# Altium PCB SparkFun GPS NEO_M9N_SMA.PcbDoc
Units mil, origin at the board's own origin, x right, y up, seen from the top; angles counter-clockwise.
Board outline 1600 x 1449 mil, 2 copper layers (Top, Bottom); 94 components, 36 nets, 153 pads, 246 vias.
Unrouted connection lines stored in the file: 1.
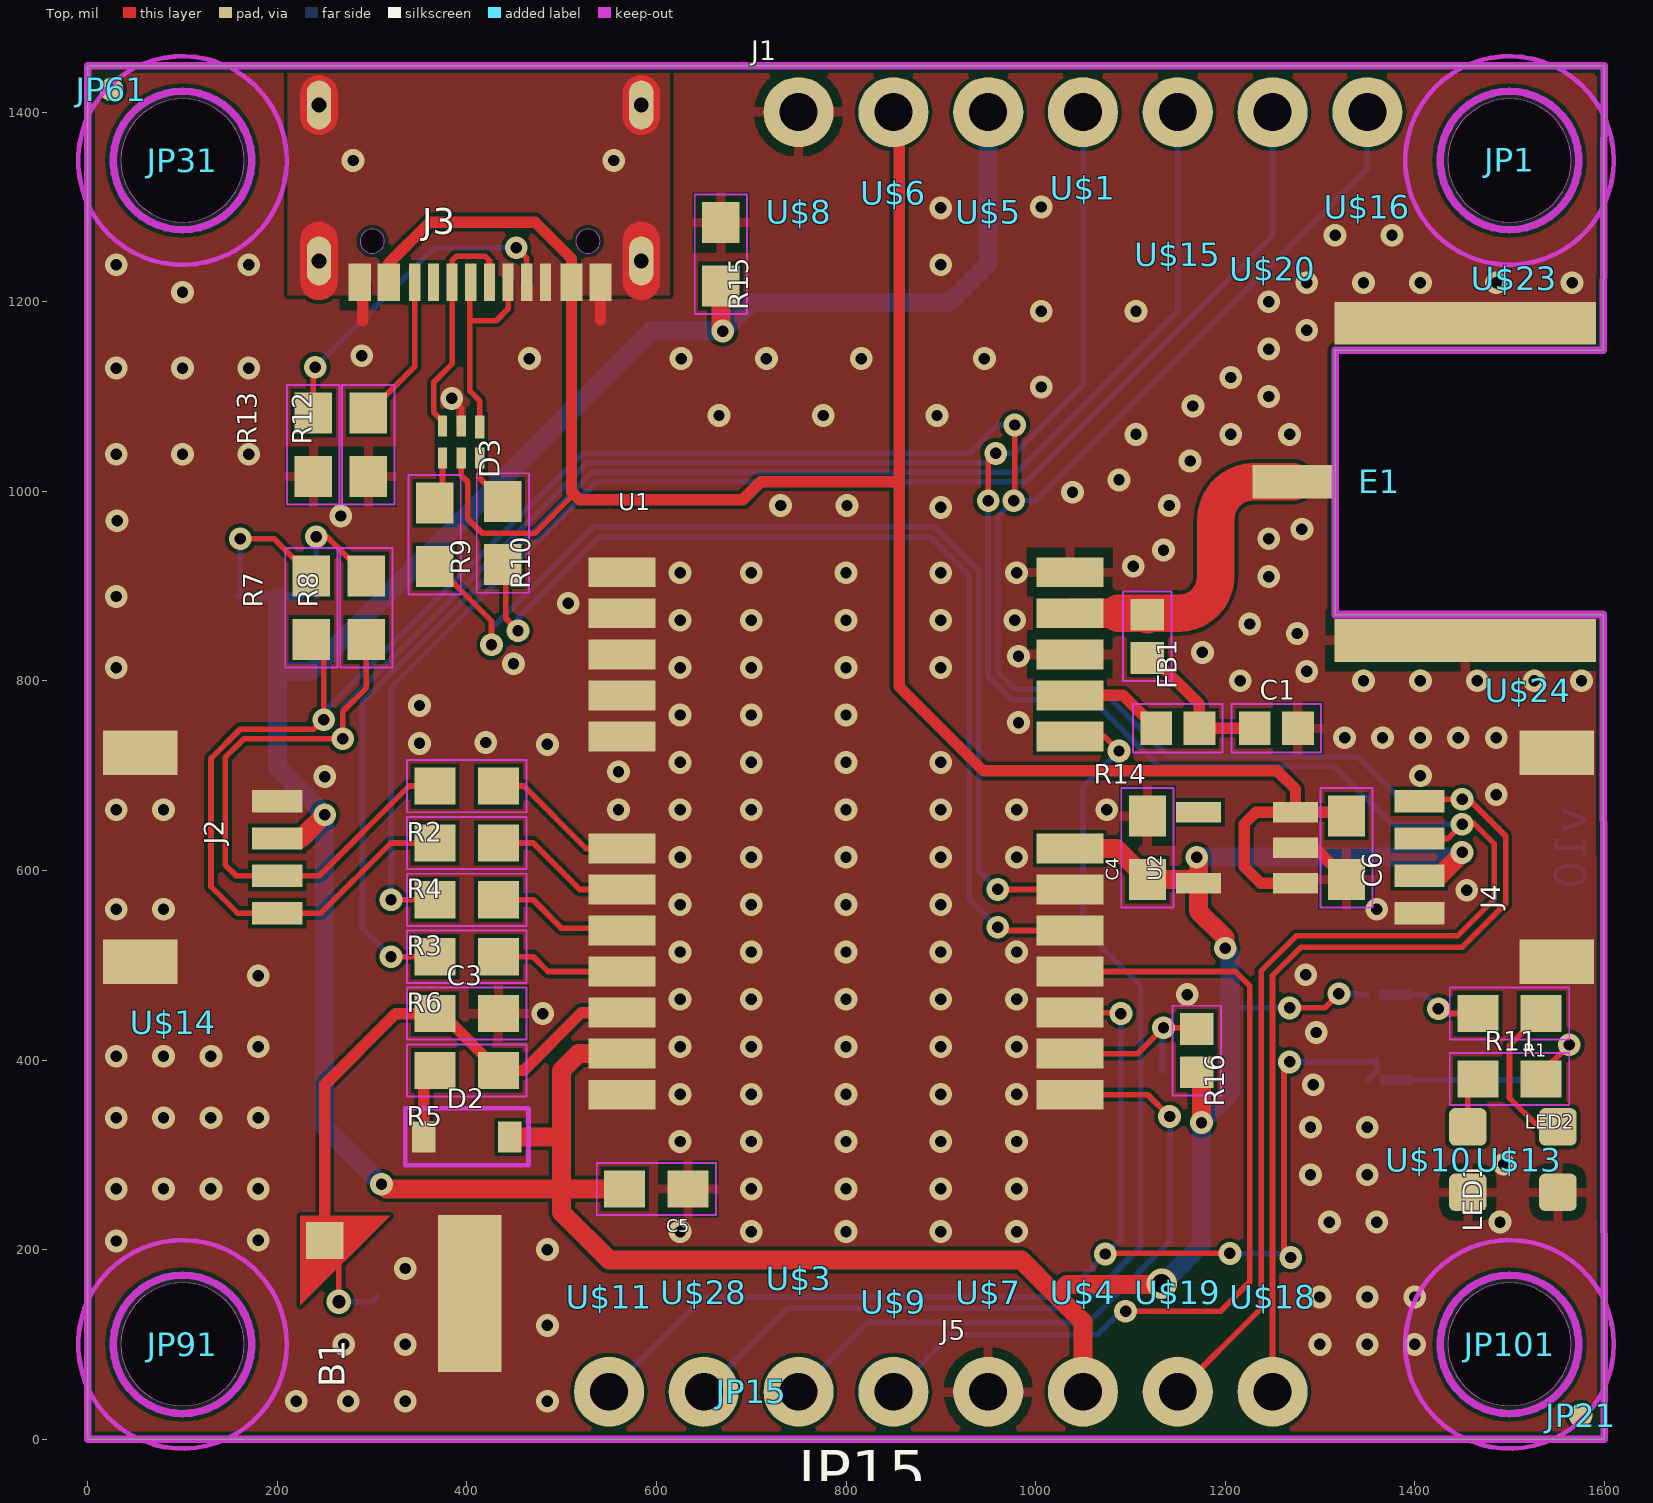
[diagram p0: Top view]
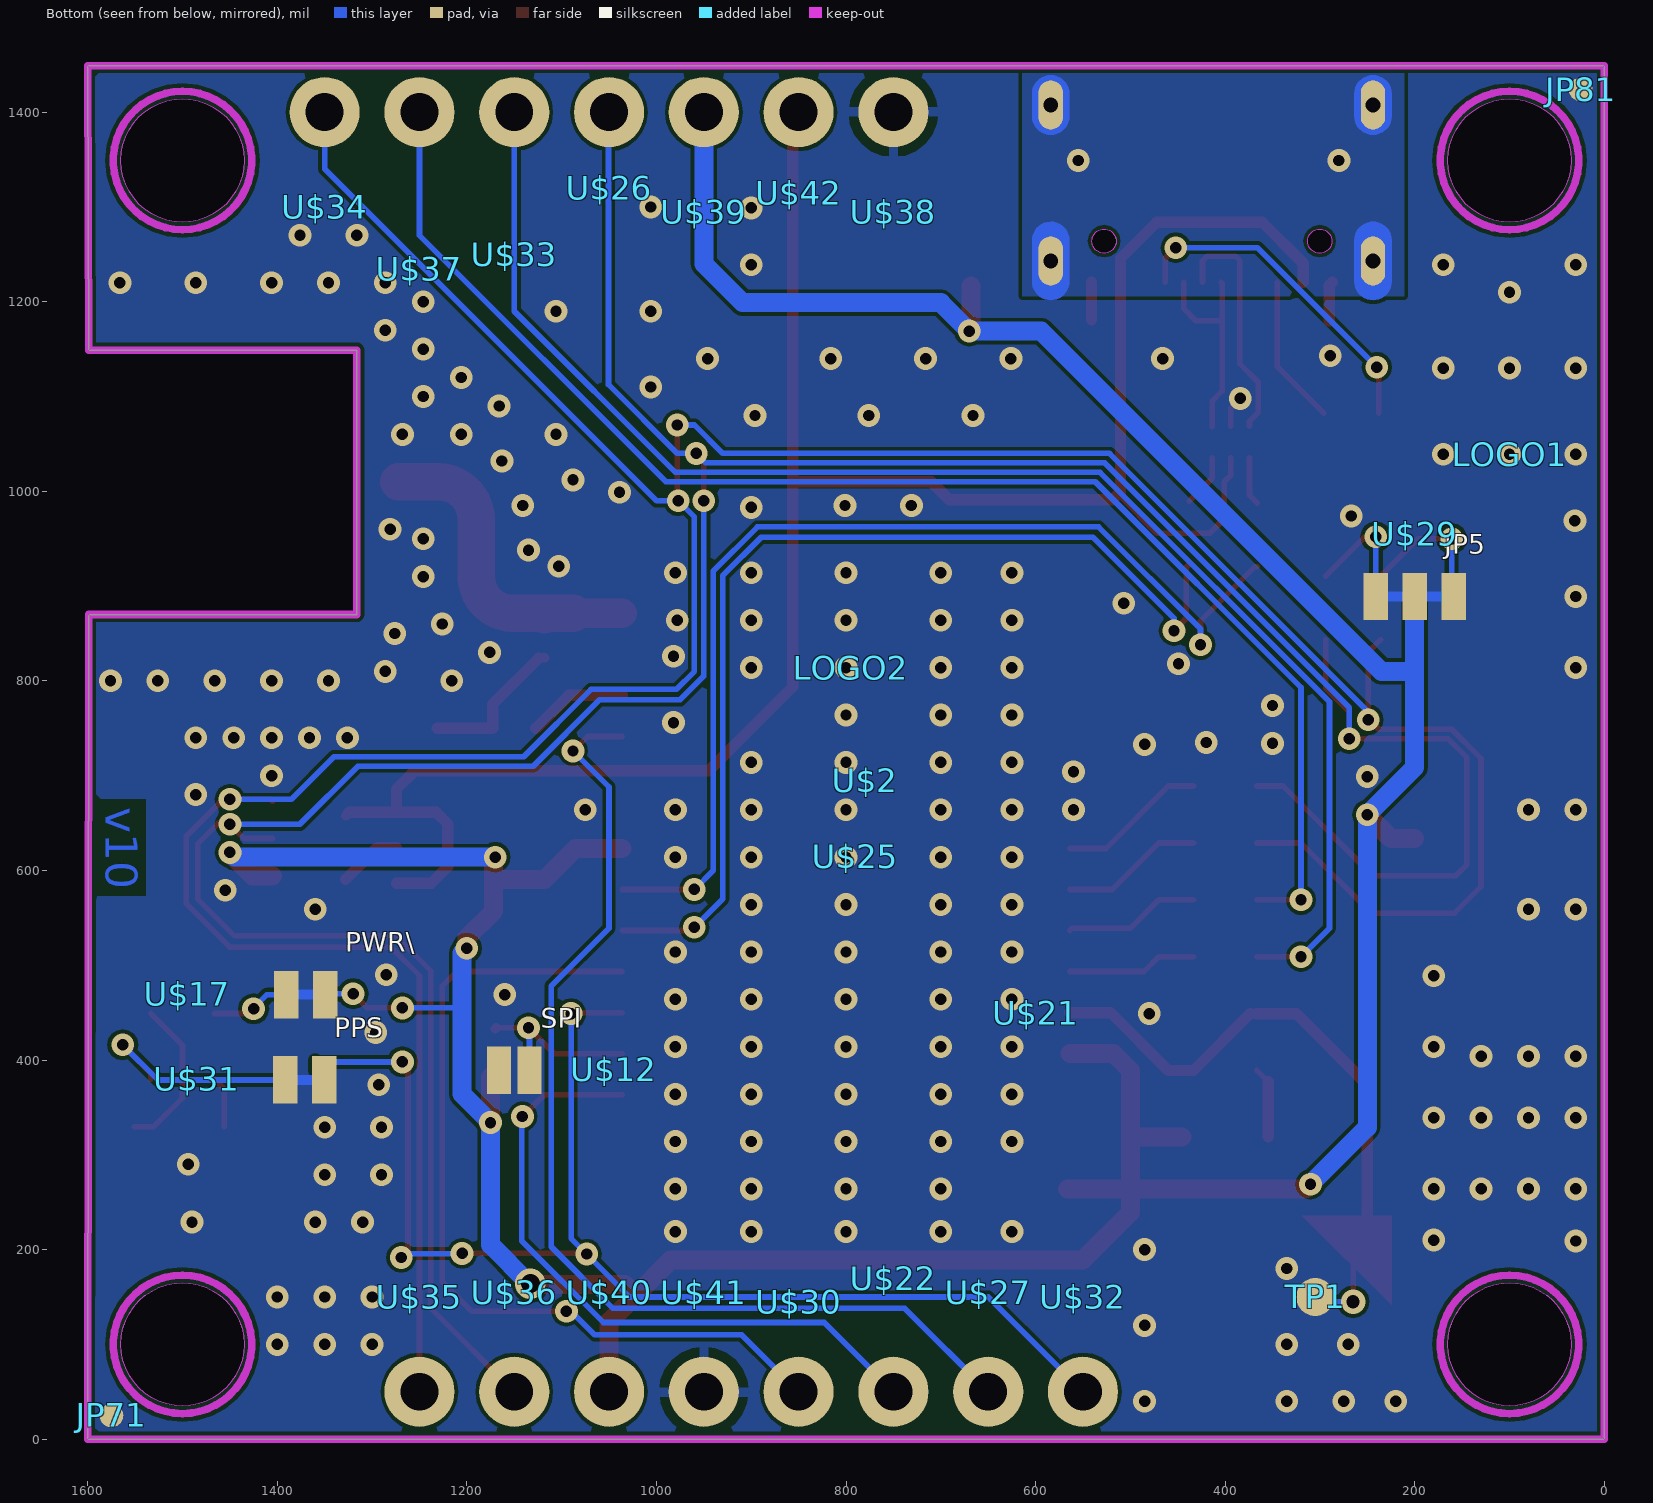
[diagram p1: Bottom view, seen from below]

## Layer stack, top to bottom
Top Solder: solder mask 0.4, Solder Resist, Dk 3.5
Top: signal copper 1.378
Dielectric 1: dielectric 12.6, FR-4, Dk 4.8
Bottom: signal copper 1.378
Bottom Solder: solder mask 0.4, Solder Resist, Dk 3.5

## Board outline
1599,1149 1600,1449 0,1449 0,0 1600,0 1599,870 1316,870 1316,1149
cut-out: 1500,35 ccw(c1500,100) 1565,100 ccw(c1500,100) 1500,165 ccw(c1500,100) 1435,100 ccw(c1500,100)
cut-out: 1500,1284 ccw(c1500,1349) 1565,1349 ccw(c1500,1349) 1500,1414 ccw(c1500,1349) 1435,1349 ccw(c1500,1349)
cut-out: 100,1284 ccw(c100,1349) 165,1349 ccw(c100,1349) 100,1414 ccw(c100,1349) 35,1349 ccw(c100,1349)
cut-out: 100,35 ccw(c100,100) 165,100 ccw(c100,100) 100,165 ccw(c100,100) 35,100 ccw(c100,100)
cut-out: 300.22,1251.1 ccw(c300.22,1263.89) 313.01,1263.89 ccw(c300.22,1263.89) 300.22,1276.68 ccw(c300.22,1263.89) 287.43,1263.89 ccw(c300.22,1263.89)
cut-out: 527.78,1251.1 ccw(c527.78,1263.89) 540.58,1263.89 ccw(c527.78,1263.89) 527.78,1276.68 ccw(c527.78,1263.89) 514.99,1263.89 ccw(c527.78,1263.89)

## Design rules (kind name [scope] priority, off if disabled: settings)
BoardOutlineClearance mdCopperDimension [All] p1: gap=10 ignorepadtopadclearanceinfootprint=FALSE except(0: Arc-SplitContinuation Track-SplitContinuation SMDPad-SplitContinuation THPad-SplitContinuation Via-SplitContinuation Fill-SplitContinuation Poly-SplitContinuation Region-SplitContinuation Text-SplitContinuation; 4: Poly-OutlineEdge Poly-CavityEdge Poly-CutoutEdge Poly-SplitBarrior)
Clearance "Clearance (Same Net)" [All] p1: gap=4 ignorepadtopadclearanceinfootprint=FALSE
Clearance Clearance_for_NetClass_Antenna [InNetClass('Antenna') vs InNetClass('Antenna')] p2: gap=11.81 ignorepadtopadclearanceinfootprint=FALSE
Clearance [All] p3: gap=4 ignorepadtopadclearanceinfootprint=FALSE
HoleSize HoleSize_For_NetClass_Antenna [InNetClass('Antenna')] p1: absolutevalues=TRUE maxlimit=0 minlimit=0 maxpercent=80.000 minpercent=20.000
HoleSize HoleSize_For_NetClass_3.3V [InNetClass('3.3V')] p2: absolutevalues=TRUE maxlimit=0 minlimit=0 maxpercent=80.000 minpercent=20.000
HoleSize HoleSize_For_NetClass_vcc [InNetClass('vcc')] p3: absolutevalues=TRUE maxlimit=0 minlimit=0 maxpercent=80.000 minpercent=20.000
HoleSize [All] p4: absolutevalues=TRUE maxlimit=100000 minlimit=6 maxpercent=80.000 minpercent=20.000
HoleToHoleClearance mdDrill [All] p1: gap=4 allowstackedmicrovias=TRUE
MinimumSolderMaskSliver [All] p1 off: minsoldermaskwidth=10
PasteMaskExpansion Expansion_SMDPaste_OFF [InPadClass('SMDPaste_OFF')] p1: expansion=0
PasteMaskExpansion mlMinCreamFrame [All] p2: expansion=0
PolygonConnect PolygonConnect_For_PolygonThermal_ON_Width100000_Gap100000 [InPolygonClass('PolygonThermal_ON_Width100000_Gap100000') vs Not IsVia] p1: connectstyle=Relief reliefconductorwidth=10 reliefentries=4 polygonreliefangle="90 Angle" airgapwidth=10
PolygonConnect PolygonConnect_For_PolygonThermal_ON_Width80000_Gap100000 [InPolygonClass('PolygonThermal_ON_Width80000_Gap100000') vs Not IsVia] p2: connectstyle=Relief reliefconductorwidth=8 reliefentries=4 polygonreliefangle="90 Angle" airgapwidth=10
PolygonConnect ThermalVias [IsVia] p3: connectstyle=Direct reliefconductorwidth=10 reliefentries=4 polygonreliefangle="90 Angle" airgapwidth=10
PolygonConnect [All] p4: connectstyle=Relief reliefconductorwidth=10 reliefentries=4 polygonreliefangle="90 Angle" airgapwidth=10
RoutingVias [All] p1: holewidth=6 width=16 viastyle="Through Hole" minholewidth=6 minwidth=16 maxholewidth=100 maxwidth=100
SolderMaskExpansion Expansion_SMDSolder_OFF [InPadClass('SMDSolder_OFF')] p1: expansion=0 istentingtop=FALSE
SolderMaskExpansion mlMinStopFrame [All] p2: expansion=4 istentingtop=FALSE
Width Width_For_NetClass_Antenna [InNetClass('Antenna')] p1: maxlimit=78.74 minlimit=10 preferedwidth=39.37
Width Width_For_NetClass_3.3V [InNetClass('3.3V')] p2: maxlimit=40 minlimit=10 preferedwidth=20
Width Width_For_NetClass_vcc [InNetClass('vcc')] p3: maxlimit=10 minlimit=6 preferedwidth=6
Width [All] p4: maxlimit=10000 minlimit=4 preferedwidth=4
26 further rules are at their usual default settings.

## Classes and differential pairs
polygon class PolygonThermal_ON_Width100000_Gap100000: Polygon_1_Net_GND Polygon_2_Net_GND
polygon class PolygonThermal_ON_Width80000_Gap100000: Polygon_1_Net_SHLD Polygon_2_Net_SHLD
pad class SMDSolder_OFF: B1-+ B1--
pad class SMDPaste_OFF: B1-+ B1-- E1-GND@0 E1-GND@1 E1-SIG JP5-1 JP5-2 JP5-3 JP21-1 JP61-1 JP71-1 JP81-1 PPS-1 PPS-2 PWR\-1 PWR\-2 SPI-1 SPI-2 TP1-P$1 U1-1 U1-2 U1-3 U1-4 U1-5 U1-6 U1-7 U1-8 U1-9 U1-10 U1-11 U1-12 U1-13 U1-14 U1-15 U1-16 U1-17 U1-18 U1-19 U1-20 U1-21 U1-22 U1-23 U1-24
net class Antenna: GPS_ANT1
net class 3.3V: 3.3V

## Components (designator, comment, footprint, x,y, rotation, side; value= is the part's Value field where it differs from the comment)
B1 "" ML414H_IV01E 330,130 r90 top
C1 "47pF" 0402 1254,750 r0 top
C3 "1.0uF" 0603 400,449 r0 top
C4 "1.0uF" 0603 1118,624 r90 top
C5 "0.1uF" 0603 600,264 r180 top
C6 "1.0uF" 0603 1328,624 r270 top
D2 "0.5A/40V/420mV" SOD-323 400,319 r0 top
D3 "PRTR5V0U2F" SOT886 394,1052 r270 top
E1 "" SMA-EDGE-SMD 1591,1010 r270 top
FB1 "FERRITE_BEAD-120_OHM-0402" 0402 1118,847 r270 top
FRAME1 "" CREATIVE_COMMONS -700,-700 r0 top
J1 "" 1X07_NO_SILK 750,1400 r0 top
J2 "" JST04_1MM_RA 200,614 r270 top
J3 "" USB-C-16P-2LAYER-PADS 414,1207 r180 top
J4 "" JST04_1MM_RA 1405,614 r90 top
J5 "" 1X04_NO_SILK 950,50 r0 top
JP1 "" STAND-OFF 1500,1349 r0 top
JP5 "JUMPER-SMT_3_2-NC_TRACE_SILK" SMT-JUMPER_3_2-NC_TRACE_SILK 200,889 r180 bottom
JP15 "" 1X04_NO_SILK 850,50 r180 top
JP21 "" MICRO-FIDUCIAL 1575,25 r0 top
JP31 "" STAND-OFF 100,1349 r0 top
JP61 "" MICRO-FIDUCIAL 25,1424 r0 top
JP71 "" MICRO-FIDUCIAL 1575,25 r180 bottom
JP81 "" MICRO-FIDUCIAL 25,1424 r180 bottom
JP91 "" STAND-OFF 100,100 r0 top
JP101 "" STAND-OFF 1500,100 r0 top
LED1 "BLUE" LED-0603 1456,295 r270 top
LED2 "RED" LED-0603 1551,295 r270 top
LOGO1 "" OSHW-LOGO-MINI 100,1039 r180 bottom
LOGO2 "" SFE_LOGO_NAME_FLAME_.1 795,814 r180 bottom
PPS "JUMPER-SMT_2_NC_TRACE_SILK" SMT-JUMPER_2_NC_TRACE_SILK 1371,379 r180 bottom
PWR\ "JUMPER-SMT_2_NC_TRACE_SILK" SMT-JUMPER_2_NC_TRACE_SILK 1370,469 r180 bottom
R1 "1k" 0603 1500,449 r180 top
R2 "33" 0603 400,689 r180 top
R3 "33" 0603 400,569 r180 top
R4 "33" 0603 400,629 r180 top
R5 "1k" 0603 400,389 r180 top
R6 "33" 0603 400,509 r180 top
R7 "2.2k" 0603 236,877 r90 top
R8 "2.2k" 0603 294,877 r90 top
R9 "27" 0603 366,954 r270 top
R10 "27" 0603 438,956 r270 top
R11 "1k" 0603 1500,380 r0 top
R12 "5.1k" 0603 296,1049 r90 top
R13 "5.1k" 0603 238,1049 r90 top
R14 "33" 0402 1150,750 r180 top
R15 "100k" 0603 668,1250 r270 top
R16 "10k" 0402 1170,410 r270 top
SPI "JUMPER-SMT_2_NO_SILK" SMT-JUMPER_2_NO_SILK 1150,389 r180 bottom
TP1 "" PAD.03X.04 305,150 r180 bottom
U1 "U-BLOX_NEO-M9N" NEO-M9N/M8T/M8U 800,639 r0 top
U2 "3.3V" SOT23-5 1223,624 r90 top
U$1 "" ##CS##9 1050,1320 r90 top
U$2 "" U#BLOX19 780,695 r180 bottom
U$3 "" ##SAFE##15 750,170 r90 top
U$4 "" #3V3#6 1050,155 r90 top
U$5 "" #3V3#6 950,1295 r90 top
U$6 "" #5V#1 850,1315 r90 top
U$7 "" #GND#0 950,155 r90 top
U$8 "" #GND#0 750,1295 r90 top
U$9 "" #INT#16 850,145 r90 top
U$10 "" PPS7 1415,295 r90 top
U$11 "" #PPS#13 550,150 r90 top
U$12 "" #SPI#22 1045,390 r180 bottom
U$13 "" PWR6 1510,295 r90 top
U$14 "" QWIIC_4MM 90,440 r0 top
U$15 "" #RX#SDI#10 1150,1250 r90 top
U$16 "" #SCK#12 1350,1300 r90 top
U$17 "" #PWR#1 1495,470 r180 bottom
U$18 "" #SCL#18 1250,150 r90 top
U$19 "" #SDA#17 1150,155 r90 top
U$20 "" #TX#SDO#11 1250,1235 r90 top
U$21 "" NEO_GPS_BOARD_SILK_FINAL#03#JPG 600,450 r180 bottom
U$22 "" ##SAFE##11 750,170 r270 bottom
U$23 "" L1#L28 1505,1225 r0 top
U$24 "" ANT8 1520,790 r0 top
U$25 "" NEO#M9N20 790,615 r180 bottom
U$26 "" ##CS##6 1050,1320 r270 bottom
U$27 "" ##RST##12 650,155 r270 bottom
U$28 "" ##RST##2 650,155 r90 top
U$29 "" #I2C#3 200,955 r180 bottom
U$30 "" #INT#10 850,145 r270 bottom
U$31 "" #PPS#0 1485,380 r180 bottom
U$32 "" #PPS#13 550,150 r270 bottom
U$33 "" #RX#SDI#4 1150,1250 r270 bottom
U$34 "" #SCK#3 1350,1300 r270 bottom
U$35 "" #SCL#8 1250,150 r270 bottom
U$36 "" #SDA#9 1150,155 r270 bottom
U$37 "" #TX#SDO#5 1250,1235 r270 bottom
U$38 "" #GND#0 750,1295 r270 bottom
U$39 "" #3V3#6 950,1295 r270 bottom
U$40 "" #3V3#6 1050,155 r270 bottom
U$41 "" #GND#0 950,155 r270 bottom
U$42 "" #5V#1 850,1315 r270 bottom

## Footprints (in the part's own frame and the unit in brackets; to place one, negate y for a bottom-side part, rotate by r counter-clockwise, add the part's x,y. Pads: shape width x height; smd on the part's side, far side on the other; paste and mask are expansions set on the pad)
1X04_NO_SILK [mil] "1X04_NO_SILK"
  round 74 hole 40: 1(0,0) 2(100,0) 3(200,0) 4(300,0)
1X07_NO_SILK [mil] "1X07_NO_SILK"
  round 74 hole 40: 1(0,0) 2(100,0) 3(200,0) 4(300,0) 5(400,0) 6(500,0) 7(600,0)
0402 [mil] "0402"
  rect 33.46x35.43 smd: 1(-22.83,0) 2(22.83,0)
  Top keep-out lines w2: -47.24,-25.59 -47.24,25.59 47.24,25.59 47.24,-25.59 -47.24,-25.59
0603 [mm] "0603"
  rect 1.1x1 smd: 1(-0.85,0) 2(0.85,0)
  Top keep-out lines w0.051: -1.6,-0.7 -1.6,0.7 1.6,0.7 1.6,-0.7 -1.6,-0.7
#3V3#6 [mil] "#3V3#6"
#5V#1 [mil] "#5V#1"
##CS##6 [mil] "##CS##6"
##CS##9 [mil] "##CS##9"
##RST##2 [mil] "##RST##2"
##RST##12 [mil] "##RST##12"
##SAFE##11 [mil] "##SAFE##11"
##SAFE##15 [mil] "##SAFE##15"
#GND#0 [mil] "#GND#0"
#I2C#3 [mil] "#I2C#3"
#INT#10 [mil] "#INT#10"
#INT#16 [mil] "#INT#16"
#PPS#0 [mil] "#PPS#0"
#PPS#13 [mil] "#PPS#13"
#PWR#1 [mil] "#PWR#1"
#RX#SDI#4 [mil] "#RX#SDI#4"
#RX#SDI#10 [mil] "#RX#SDI#10"
#SCK#3 [mil] "#SCK#3"
#SCK#12 [mil] "#SCK#12"
#SCL#8 [mil] "#SCL#8"
#SCL#18 [mil] "#SCL#18"
#SDA#9 [mil] "#SDA#9"
#SDA#17 [mil] "#SDA#17"
#SPI#22 [mil] "#SPI#22"
#TX#SDO#5 [mil] "#TX#SDO#5"
#TX#SDO#11 [mil] "#TX#SDO#11"
ANT8 [mil] "ANT8"
CREATIVE_COMMONS [mil] "CREATIVE_COMMONS"
JST04_1MM_RA [mm] "JST04_1MM_RA"
  rect 0.6x1.35 smd: 1(-1.5,0) 2(-0.5,0) 3(0.5,0) 4(1.5,0)
  rect 1.2x2 smd: NC1(2.8,-3.675) NC2(-2.8,-3.675)
L1#L28 [mil] "L1#L28"
LED-0603 [mm] "LED-0603"
  rrect30% 1x1 smd: A(-0.877,0) C(0.877,0)
MICRO-FIDUCIAL [mil] "MICRO-FIDUCIAL"
  rrect100% 25x25 smd paste+0: 1(0,0)
ML414H_IV01E [mm] "ML414H_IV01E"
  rect 1x1 smd paste+0 mask+0: +(2.022,2.032)
  rect 4.2x1.7 smd paste+0 mask+0: -(0.6,-1.85)
  Top region: 0.28,2.68 2.68,2.68 2.68,0.28 0.28,2.68
NEO#M9N20 [mil] "NEO#M9N20"
NEO-M9N/M8T/M8U [mm] "NEO-M9N/M8T/M8U"
  rect 1.8x0.8 smd paste+0: 1(6,-7) 2(6,-5.9) 3(6,-4.8) 4(6,-3.7) 5(6,-2.6) 6(6,-1.5) 7(6,-0.4) 8(6,2.6) 9(6,3.7) 10(6,4.8) 11(6,5.9) 12(6,7) 13(-6,7) 14(-6,5.9) 15(-6,4.8) 16(-6,3.7) 17(-6,2.6) 18(-6,-0.4) 19(-6,-1.5) 20(-6,-2.6) 21(-6,-3.7) 22(-6,-4.8) 23(-6,-5.9) 24(-6,-7)
NEO_GPS_BOARD_SILK_FINAL#03#JPG [mil] "NEO_GPS_BOARD_SILK_FINAL#03#JPG"
OSHW-LOGO-MINI [mil] "OSHW-LOGO-MINI"
PAD.03X.04 [mil] "PAD.03X.04"
  rrect100% 40x40 smd paste+0: P$1(0,0)
PPS7 [mil] "PPS7"
PWR6 [mil] "PWR6"
QWIIC_4MM [mil] "QWIIC_4MM"
SFE_LOGO_NAME_FLAME_.1 [mil] "SFE_LOGO_NAME_FLAME_.1"
SMA-EDGE-SMD [mm] "SMA-EDGE-SMD"
  rect 1.15x7 smd paste+0: GND@0(-4.25,-3.5) GND@1(4.25,-3.5)
  rect 0.9x2.2 smd paste+0: SIG(0,-8.1)
SMT-JUMPER_2_NC_TRACE_SILK [mil] "SMT-JUMPER_2_NC_TRACE_SILK"
  rect 26x50 smd paste+0: 1(-20.5,0) 2(20.5,0)
  Top region: -27.5,5 7.25,5 7.25,-5 -27.5,-5 -27.5,5
SMT-JUMPER_2_NO_SILK [mil] "SMT-JUMPER_2_NO_SILK"
  rect 25x50 smd paste+0: 1(-16,0) 2(16,0)
SMT-JUMPER_3_2-NC_TRACE_SILK [mil] "SMT-JUMPER_3_2-NC_TRACE_SILK"
  rect 26x50 smd paste+0: 1(-41,0) 2(0,0) 3(41,0)
  Top region: -27.75,5 27.75,5 27.75,-5 -27.75,-5 -27.75,5
SOD-323 [mil] "SOD-323"
  rect 24.8x32.68 smd: A(45.28,0) C(-45.28,0)
  Top keep-out lines w5: -65,-30 -65,30 65,30 65,-30 -65,-30
SOT23-5 [mil] "SOT23-5"
  rect 21.65x47.24 smd: 1(-37.4,-51.19) 2(0,-51.19) 3(37.4,-51.19) 4(37.4,51.19) 5(-37.4,51.19)
SOT886 [mil] "SOT886"
  rect 24.02x9.84 smd: 1(-15.94,19.69)
  rect 22.05x9.84 smd: 2(-16.93,0) 3(-16.93,-19.69) 4(16.93,-19.69) 5(16.93,0) 6(16.93,19.69)
STAND-OFF [mil] "STAND-OFF"
  Top keep-out circle w5: c0,0 r110
  Top keep-out lines w8: 0,-73 cw(c0,0) 0,73 cw(c0,0) 0,-73
  Bottom keep-out lines w8: 0,-73 cw(c0,0) 0,73 cw(c0,0) 0,-73
U#BLOX19 [mil] "U#BLOX19"
USB-C-16P-2LAYER-PADS [mm] "USB-C-16P-2LAYER-PADS"
  rect 0.3x1 smd: A5(-1.25,-0.34) A6(-0.25,-0.34) A7(0.25,-0.34) A8(1.25,-0.34) B5(1.75,-0.34) B6(0.75,-0.34) B7(-0.75,-0.34) B8(-1.75,-0.34)
  rect 0.6x1 smd: GND(-3.225,-0.34) GND2(3.225,-0.34) VBUS1(-2.45,-0.34) VBUS2(2.45,-0.34)
  oval 0.654x1.308 / inner oval 0.705x1.41 / far side oval 0.654x1.308 hole 0.4: SHLD1(-4.318,-0.915) SHLD2(4.318,-0.915) SHLD3(-4.318,-5.095) SHLD4(4.318,-5.095)
  Top region: 4.818,-4.795 4.818,-5.395 4.78,-5.586 4.672,-5.749 4.509,-5.857 4.318,-5.895 4.318,-5.895 4.127,-5.857 3.964,-5.749 3.856,-5.586 3.818,-5.395 3.818,-5.395 3.818,-4.795 3.856,-4.604 3.964,-4.441 4.127,-4.333 4.318,-4.295 4.318,-4.295 4.509,-4.333 4.672,-4.441 4.78,-4.604 4.818,-4.795 4.818,-4.795
  Top region: -4.318,-5.895 -4.509,-5.857 -4.672,-5.749 -4.78,-5.586 -4.818,-5.395 -4.818,-5.395 -4.818,-4.795 -4.78,-4.604 -4.672,-4.441 -4.509,-4.333 -4.318,-4.295 -4.318,-4.295 -4.127,-4.333 -3.964,-4.441 -3.856,-4.604 -3.818,-4.795 -3.818,-4.795 -3.818,-5.395 -3.856,-5.586 -3.964,-5.749 -4.127,-5.857 -4.318,-5.895 -4.318,-5.895
  Top region: 4.818,-0.365 4.818,-1.465 4.78,-1.656 4.672,-1.819 4.509,-1.927 4.318,-1.965 4.318,-1.965 4.127,-1.927 3.965,-1.819 3.856,-1.656 3.818,-1.465 3.818,-1.465 3.818,-0.365 3.856,-0.174 3.964,-0.011 4.127,0.097 4.318,0.135 4.318,0.135 4.509,0.097 4.672,-0.011 4.78,-0.174 4.818,-0.365 4.818,-0.365
  Top region: -3.818,-0.365 -3.818,-1.465 -3.856,-1.656 -3.965,-1.819 -4.127,-1.927 -4.318,-1.965 -4.318,-1.965 -4.568,-1.898 -4.751,-1.715 -4.818,-1.465 -4.818,-1.465 -4.818,-0.365 -4.78,-0.174 -4.672,-0.011 -4.509,0.097 -4.318,0.135 -4.318,0.135 -4.127,0.097 -3.964,-0.011 -3.856,-0.174 -3.818,-0.365 -3.818,-0.365
  Bottom region: 4.318,-5.895 4.509,-5.857 4.672,-5.749 4.78,-5.586 4.818,-5.395 4.818,-5.395 4.818,-4.795 4.78,-4.604 4.672,-4.441 4.509,-4.333 4.318,-4.295 4.318,-4.295 4.127,-4.333 3.964,-4.441 3.856,-4.604 3.818,-4.795 3.818,-4.795 3.818,-5.395 3.856,-5.586 3.964,-5.749 4.127,-5.857 4.318,-5.895 4.318,-5.895
  Bottom region: -4.818,-4.795 -4.818,-5.395 -4.78,-5.586 -4.672,-5.749 -4.509,-5.857 -4.318,-5.895 -4.318,-5.895 -4.127,-5.857 -3.964,-5.749 -3.856,-5.586 -3.818,-5.395 -3.818,-5.395 -3.818,-4.795 -3.856,-4.604 -3.964,-4.441 -4.127,-4.333 -4.318,-4.295 -4.318,-4.295 -4.509,-4.333 -4.672,-4.441 -4.78,-4.604 -4.818,-4.795 -4.818,-4.795
  Bottom region: 3.818,-0.365 3.818,-1.465 3.856,-1.656 3.965,-1.819 4.127,-1.927 4.318,-1.965 4.318,-1.965 4.509,-1.927 4.672,-1.819 4.78,-1.656 4.818,-1.465 4.818,-1.465 4.818,-0.365 4.78,-0.174 4.672,-0.011 4.509,0.097 4.318,0.135 4.318,0.135 4.127,0.097 3.964,-0.011 3.856,-0.174 3.818,-0.365 3.818,-0.365
  Bottom region: -4.818,-0.365 -4.818,-1.465 -4.751,-1.715 -4.568,-1.898 -4.318,-1.965 -4.318,-1.965 -4.127,-1.927 -3.965,-1.819 -3.856,-1.656 -3.818,-1.465 -3.818,-1.465 -3.818,-0.365 -3.856,-0.174 -3.964,-0.011 -4.127,0.097 -4.318,0.135 -4.318,0.135 -4.509,0.097 -4.672,-0.011 -4.78,-0.174 -4.818,-0.365 -4.818,-0.365

## Part data
B1: library part ML414H_IV01E, PackageName=ML414H_IV01E
C1 FB1 R14 R16: library part 0402, PackageName=0402
C3 C4 C5 C6 R1 R2 R3 R4 R5 R6 R7 R8 R9 R10 R11 R12 R13 R15: library part 0603, PackageName=0603
D2: library part SOD-323, PackageName=SOD-323
D3: library part SOT886, PackageName=SOT886
E1: library part SMA-EDGE-SMD, PackageName=SMA-EDGE-SMD
FRAME1: library part CREATIVE_COMMONS, PackageName=CREATIVE_COMMONS
J1: library part 1X07_NO_SILK, PackageName=1X07_NO_SILK
J2 J4: library part JST04_1MM_RA, PackageName=JST04_1MM_RA
J3: library part USB-C-16P-2LAYER-PADS, PackageName=USB-C-16P-2LAYER-PADS
J5 JP15: library part 1X04_NO_SILK, PackageName=1X04_NO_SILK
JP1 JP31 JP91 JP101: library part STAND-OFF, PackageName=STAND-OFF
JP5: library part SMT-JUMPER_3_2-NC_TRACE_SILK, PackageName=SMT-JUMPER_3_2-NC_TRACE_SILK
JP21 JP61 JP71 JP81: library part MICRO-FIDUCIAL, PackageName=MICRO-FIDUCIAL
LED1 LED2: library part LED-0603, PackageName=LED-0603
LOGO1: library part OSHW-LOGO-MINI, PackageName=OSHW-LOGO-MINI
LOGO2: library part SFE_LOGO_NAME_FLAME_.1, PackageName=SFE_LOGO_NAME_FLAME_.1
PPS PWR\: library part SMT-JUMPER_2_NC_TRACE_SILK, PackageName=SMT-JUMPER_2_NC_TRACE_SILK
SPI: library part SMT-JUMPER_2_NO_SILK, PackageName=SMT-JUMPER_2_NO_SILK
TP1: library part PAD.03X.04, PackageName=PAD.03X.04
U1: library part NEO-M9N/M8T/M8U, PackageName=NEO-M9N/M8T/M8U
U2: library part SOT23-5, PackageName=SOT23-5
U$1: library part ##CS##9, PackageName=##CS##9
U$2: library part U#BLOX19, PackageName=U#BLOX19
U$3: library part ##SAFE##15, PackageName=##SAFE##15
U$4 U$5 U$39 U$40: library part #3V3#6, PackageName=#3V3#6
U$6 U$42: library part #5V#1, PackageName=#5V#1
U$7 U$8 U$38 U$41: library part #GND#0, PackageName=#GND#0
U$9: library part #INT#16, PackageName=#INT#16
U$10: library part PPS7, PackageName=PPS7
U$11 U$32: library part #PPS#13, PackageName=#PPS#13
U$12: library part #SPI#22, PackageName=#SPI#22
U$13: library part PWR6, PackageName=PWR6
U$14: library part QWIIC_4MM, PackageName=QWIIC_4MM
U$15: library part #RX#SDI#10, PackageName=#RX#SDI#10
U$16: library part #SCK#12, PackageName=#SCK#12
U$17: library part #PWR#1, PackageName=#PWR#1
U$18: library part #SCL#18, PackageName=#SCL#18
U$19: library part #SDA#17, PackageName=#SDA#17
U$20: library part #TX#SDO#11, PackageName=#TX#SDO#11
U$21: library part NEO_GPS_BOARD_SILK_FINAL#03#JPG, PackageName=NEO_GPS_BOARD_SILK_FINAL#03#JPG
U$22: library part ##SAFE##11, PackageName=##SAFE##11
U$23: library part L1#L28, PackageName=L1#L28
U$24: library part ANT8, PackageName=ANT8
U$25: library part NEO#M9N20, PackageName=NEO#M9N20
U$26: library part ##CS##6, PackageName=##CS##6
U$27: library part ##RST##12, PackageName=##RST##12
U$28: library part ##RST##2, PackageName=##RST##2
U$29: library part #I2C#3, PackageName=#I2C#3
U$30: library part #INT#10, PackageName=#INT#10
U$31: library part #PPS#0, PackageName=#PPS#0
U$33: library part #RX#SDI#4, PackageName=#RX#SDI#4
U$34: library part #SCK#3, PackageName=#SCK#3
U$35: library part #SCL#8, PackageName=#SCL#8
U$36: library part #SDA#9, PackageName=#SDA#9
U$37: library part #TX#SDO#5, PackageName=#TX#SDO#5

## Free pads (board coordinates)
  round 130 hole 130 unplated: MH1(100,100) MH1(100,1349) MH1(1500,100) MH1(1500,1349)
  round 25.59 hole 25.59 unplated: MH1(527.78,1263.89) MH2(300.22,1263.89)

## Via types
v1: diameter 24/24 (per signal layer), hole 12, Top to Bottom, 244 vias
v2: diameter 25.78/25.78 (per signal layer), hole 13.78, Top to Bottom, 1 vias
v3: diameter 32/32 (per signal layer), hole 20, Top to Bottom, 1 vias

## Nets (pads, with @x,y where several pads share a name; then routed paths per layer and width w, separated by ;. In a path a pad name is that pad's centre, name@x,y a point inside that pad or via, vN(x,y) a via of type N, cw(c..) or ccw(c..) an arc to the next point about the centre after c; other vN are vias at no path point)
3.3V: C4.1 C5.2 D2.A J1.3 J2.2 J4.2 J5.2 JP5.2 PWR\.2 R15.2 R16.2 U1.7 U1.23 U2.5 | length 4376.5
  Top w6: v1(1268,455) 1305,455 v1(1320,470)
  Top w20: J2.2 225,633.68 v1(250,658.68) ; v1(310,269) 315,264 500,264 ; D2.A 500,319 ; U1.23 517.72,406.72 500,389 500,319 ; C5.2 500,264 ; R15.2 668,1171 v1(670,1169) ; U1.7 1085.28,623.25 C4.1 1167.88,590.54 U2.5 ; J5.2 1050,124 1022,152 ; v3(1133,164) 1132,163 1033,163 1022,152 ; R16.2 1175,382.17 v1(1175,334) ; v1(1170,614) 1171.82,612.18 U2.5 ; v1(1200,518) 1200,529 1171.82,557.18 U2.5 ; J4.2 1426.32,594.32 1450,618 v1(1450,619) ; 500,264 500,319 ; 500,264 500,239 550,189 985,189 1022,152
  Bottom w6: 1205,460 1210,455 v1(1268,455) ; v1(1320,470) 1340,470 1341,469 PWR\.2
  Bottom w20: JP5.2 200,810 ; v1(310,269) 250,329 v1(250,658.68) 200,708.68 200,810 ; J1.3 950,1240 909,1199 700,1199 v1(670,1169) 669.91,1168.91 594,1168.91 235.09,810 200,810 ; v3(1133,164) 1134,164 1175,205 v1(1175,334) 1205,364 1205,460 1205,513 v1(1200,518) ; v1(1170,614) 1445,614 v1(1450,619)
5V: C6.1 D3.5 J1.2 J3.VBUS1 J3.VBUS2 U2.1 U2.3 | length 2370.6
  Top w6: D3.5 394,1017 401,1010 401,971 416.19,955.81 471.72,955.81 510.91,995 515,995
  Top w10: J1.2 856,1394 J1.2@856,1393 ; C6.1@1324.96,660.5 C6.1
  Top w12: J3.VBUS2 317.54,1240.54 361,1284 472,1284 510.46,1245.54 J3.VBUS1 510.46,999.54 515,995 519,991 691,991 710,1010 856,1010 ; J1.2@856,1393 856,1010 ; U2.1 1237.4,586.6 1220,604 1220,649 1232.4,661.4 U2.3 ; C6.1@1324.96,660.5 1325,660.54 1324.13,661.4 U2.3 ; 856,1010 856,794 945,705 1255,705 1274.19,685.82 U2.3
!RESET: JP15.3 U1.8 | length 1146.5
  Top w6: U1.8 1072.64,741.36 v1(1088,726)
  Bottom w6: JP15.3 738,138 1045.97,138 1111,203.03 1111,478 1050,539 1050,688 v1(1088,726)
!SAFE: JP15.2 U1.1 | length 704.2
  Top w6: U1.1 1118.32,363.41 v1(1141.36,340.36)
  Bottom w6: JP15.2 823,123 1055.97,123 1142,209.03 1142,339.73 v1(1141.36,340.36)
D+: D3.4 R9.1 | length 51.1
  Top w6: R9.1 374.32,995.78 D3.4
D-: D3.6 R10.1 | length 55.7
  Top w6: D3.6 413.69,1013.78 R10.1
D_SEL: R16.1 SPI.2 U1.2 | length 191
  Top w6: U1.2 1107.72,406.72 v1(1135,434) R16.1@1168.83,434
  Top w10: R16.1@1168.83,434 R16.1
  Bottom w6: SPI.2 1134,433 v1(1135,434)
GND: B1.- C1.2 C3.2 C4.2 C5.1 C6.2 D3.2 E1.GND@0 E1.GND@1 J1.1 J2.1 J3.GND J3.GND2 J4.1 J5.1 LED1.C LED2.C R12.1 R13.1 R15.1 SPI.1 U1.10 U1.12 U1.13 U1.24 U2.2 | length 181.9
  Top w6: v1(384,1098) 394,1088 D3.2
  Top w12: J3.GND2 290,1217.42 290,1180 ; 540.97,1180.97 J3.GND ; U2.2 1294.54,624 C6.2
  other v1: 220,40 275,40 335,40 485,40 270,100 335,100 1300,100 1350,100 1400,100 485,120 1300,150 1350,150 1400,150 335,180 485,200 30,209 180,210 625,219 700,219 800,219 900,219 980,219 1310,229 1360,229 1490,229 30,264 80,264 130,264 180,264 700,264 800,264 900,264 980,264 1290,279 1350,279 1494,290 625,314 700,314 800,314 900,314 980,314 1290,329 1350,329 30,339 80,339 130,339 180,339 625,364 700,364 800,364 900,364 980,364 1293,374 30,404 80,404 130,404 180,414 625,414 700,414 800,414 900,414 980,414 1296,429 480,449 625,464 700,464 800,464 900,464 980,464 1160,469 180,489 1285,490 625,514 700,514 800,514 900,514 980,514 30,559 80,559 1360,559 625,564 700,564 800,564 900,564 1455,579 625,614 700,614 800,614 900,614 980,614 30,664 80,664 560,664 625,664 700,664 800,664 900,664 980,664 1075,664 1486,680 250,699 1406,700 560,704 625,714 700,714 800,714 900,714 485,733 350,734 420,735 1326,740 1366,740 1406,740 1446,740 1486,740 982,756 625,764 700,764 800,764 350,774 1216,800 1346,800 1406,800 1466,800 1526,800 1576,800 1286,810 30,814 625,814 700,814 800,814 900,814 449.17,818.04 982,826 1176,830 1276,850 1226,860 625,864 700,864 800,864 900,864 978,864 507,882 30,889 1246,910 625,914 700,914 800,914 900,914 980,914 1103,921 1135,938 1246,950 1281,960 31,969 267,974 900,983 731,985 801,985 1141,985 1039,999 1088,1012 1163,1032 30,1039 100,1039 170,1039 1106,1060 1206,1060 1268,1060 666,1080 776,1080 896,1080 1166,1090 1246,1100 1006,1110 1206,1120 30,1130 100,1130 170,1130 466,1140 626,1140 716,1140 816,1140 946,1140 289,1143 1246,1150 1286,1170 1006,1190 1106,1190 1246,1200 100,1210 1286,1220 1346,1220 1406,1220 1486,1220 1566,1220 30,1239 170,1239 900,1239 1316,1270 1376,1270 900,1299 1006,1300
GPS_ANT1: E1.SIG FB1.1 U1.11 | length 342.5
  Top w31.5: U1.11 1087.82,871.28
  Top w39.37: 1087.82,871.28 1116.55,871.28 cw(c1116.55,869.83) FB1.1 cw(c1119.45,869.83) 1119.45,871.28 1151.28,871.28 ccw(c1151.28,910) 1190,910 1190,970 cw(c1230,970) 1230,1010 E1.SIG
INT: JP15.1 U1.4 | length 932.2
  Top w6: U1.4 1210.67,493.33 1226,478 1226,166 1195,135 v1(1095,135)
  Bottom w6: JP15.1 910,110 1065,110 1090,135 v1(1095,135)
N$1: PWR\.1 R1.2 | length 84.9
  Top w6: v1(1425,454) 1430,449 R1.2
  Bottom w6: PWR\.1 1411,469 1425,455 v1(1425,454)
N$2: LED1.A R11.1 | length 54.8
  Top w6: LED1.A 1456,369.46 R11.1
N$3: C1.1 FB1.2 R14.1 | length 158.7
  Top w10: FB1.2 FB1.2@1124,824.17
  Top w12: FB1.2@1124,824.17 1172.83,775.33 R14.1 C1.1
N$4: PPS.1 R11.2 | length 235.1
  Top w6: R11.2 1533.46,386.46 v1(1563,416)
  Bottom w6: PPS.1 1526,379 v1(1563,416)
N$5: JP5.1 R8.2 | length 133.2
  Top w6: v1(241,952) 252.46,952 R8.2
  Bottom w6: JP5.1 v1(241,952)
N$6: D2.C R5.2 | length 74.9
  Top w6: R5.2@354.72,377.19 R5.2
  Top w12: D2.C R5.2@354.72,377.19
N$7: J3.B5 R12.2 | length 158.3
  Top w6: R12.2 345.1,1131.57 J3.B5
N$8: JP5.3 R7.2 | length 153.5
  Top w6: v1(161,950) 196.46,950 R7.2
  Bottom w6: JP5.3 ccw(c159,891) 161,891 v1(161,950)
N$9: J3.A5 R13.2 | length 354.8
  Top w6: R13.2 238,1129 v1(240,1131) ; v1(452,1257) 463.21,1245.79 J3.A5
  Bottom w6: v1(240,1131) 366,1257 v1(452,1257)
N$10: LED2.A R1.1 | length 166.5
  Top w6: R1.1 1500,415.54 1500,360 1530.47,329.53 LED2.A
N$11: R9.2 U1.6 | length 1124.2
  Top w6: R9.2 368.46,920.54 426,863 v1(426,838) ; v1(960,580) 960.06,579.94 U1.6
  Bottom w6: v1(426,838) 426,855.06 533.46,962.51 893.49,962.51 940,916 940,600 v1(960,580)
N$12: R10.2 U1.5 | length 1078.4
  Top w6: R10.2 441,919.54 441,866 v1(454,853) ; v1(960,540) 963.36,536.64 U1.5
  Bottom w6: v1(454,853) 454,866 539.51,951.51 889.49,951.51 930,911 930,570 v1(960,540)
PPS: JP15.4 PPS.2 U1.3 | length 1425.7
  Top w6: U1.3 1088.98,450.02 v1(1090,449) ; v1(1073.64,195.36) 1074.27,196 v1(1205,196) ; v1(1268,398) 1262,392 1262,199 v1(1269.29,191.71)
  Bottom w6: JP15.4 650,150 1028.27,150 v1(1073.64,195.36) 1090,211.73 v1(1090,449) ; v1(1205,196) 1205.29,195.71 1265.29,195.71 v1(1269.29,191.71) ; v1(1268,398) 1320,398 1358,398 1360,400 1360,388.5 PPS.2
RXI/SDI: J1.5 R6.2 | length 1568.6
  Top w6: v1(320,509) R6.2
  Bottom w6: v1(320,509) 290,539 290,778 532,1020 980,1020 1150,1190 J1.5
RXLV: R6.1 U1.21 | length 136.8
  Top w6: R6.1 470,509 485.67,493.33 U1.21
SCL/SCK: J1.7 J2.4 J4.4 J5.4 R4.2 R7.1 | length 3789.7
  Top w6: R7.1 249.06,830.48 v1@249.06,760 ; v1(249.06,759) v1@249.06,760 ; R4.2 320,629 245.94,554.94 J2.4 158.06,554.94 130,583 130,718.14 160.86,749 238.06,749 v1@249.06,760 ; v1(977,990) 978,991 v1(978,1070) ; J5.4 1250,489 1280,519 1450,519 1496.02,565.02 1496.02,636.1 1457.06,675.06 v1(1450,675.06) 1407,675.06 J4.4
  Bottom w6: v1(249.06,759) 249.06,767 522.06,1040 930,1040 960,1070 v1(978,1070) ; J1.7 1350,1340 1000,990 v1(977,990) 960,973 960,810 979,791 1069,791 1140,720 1340,720 1384.94,675.06 v1(1450,675.06)
SCL_LV: R4.1 U1.19 | length 150.6
  Top w6: R4.1 470,629 519.06,579.94 U1.19
SDA/!CS: J1.4 J2.3 J4.3 J5.3 R2.2 R8.1 | length 3582.9
  Top w6: R8.1 294,792.54 269,767.54 v1(269,739) 165,739 145,719 145,606 156.69,594.32 J2.3 244.32,594.32 339,689 R2.2 ; v1(950,990) 950,1032 v1(958,1040) ; J5.3 1238,138 1238,493.97 1275.03,531 1445.03,531 1484.01,569.99 1484.01,627.99 1462,650 1451.32,650 v1(1450,648.68) 1435,633.68 J4.3
  Bottom w6: v1(269,739) 269,771.97 527.03,1030 948,1030 v1(958,1040) 978,1040 1050.5,1112.5 1050.5,1399.5 J1.4 ; v1(950,990) 950,805 975,780 1060,780 1130,710 1315,710 1376.32,648.68 v1(1450,648.68)
SDA_LV: R2.1 U1.18 | length 157.6
  Top w6: R2.1 460,689 525.75,623.25 U1.18
SHLD: J3.SHLD1 J3.SHLD2 J3.SHLD3 J3.SHLD4
  other v1: 280,1349 555,1349
TXLV: R3.1 U1.20 | length 143.7
  Top w6: R3.1 470,569 500,539 561.42,539 U1.20
TXO/SDO: J1.6 R3.2 | length 1528.1
  Top w6: v1(320,569) R3.2
  Bottom w6: v1(320,569) 320,793.03 536.97,1010 990,1010 1250,1270 J1.6
USB_D+: D3.3 J3.A6 J3.B6 | length 252.5
  Top w6: D3.3 374.32,1073.93 365,1083.24 365,1115 384.47,1134.47 J3.B6 384.47,1243.47 389,1248 419,1248 423.84,1243.16 J3.A6
USB_D-: D3.1 J3.A7 J3.B7 | length 230.6
  Top w6: J3.A7 403.16,1219.39 403.16,1180 ; D3.1 413.69,1095.32 403.16,1105.84 403.16,1180 ; J3.B7 443.53,1192.53 431,1180 403.16,1180
V_BATT: B1.+ C3.1 R5.1 TP1.P$1 U1.22 | length 672.3
  Top w6: B1.+ 265,194.61 v2(265,145) ; C3.1 C3.1@373.46,449
  Top w12: B1.+ 250,374 325,449 C3.1 ; C3.1@373.46,449 R5.1 460,389 521.02,450.02 U1.22
  Bottom w6: v2(265,145) 300,145 TP1.P$1
VCC_RF: R14.2 U1.9 | length 105.3
  Top w12: U1.9 1092.5,784.67 R14.2
pads on no net: J2.NC1 J2.NC2 J3.A8 J3.B8 J4.NC1 J4.NC2 JP21.1 JP61.1 JP71.1 JP81.1 U1.14 U1.15 U1.16 U1.17 U2.4

## Polygon pours and split planes (outlines as drawn)
SHLD on Top "Polygon_2_Net_SHLD" (solid, remove dead copper, pour order 0): 614,1453 614,1207 211,1207 211,1453
GND on Top "Polygon_1_Net_GND" (solid, remove dead copper, pour order 3): -5,1454 1605,1454 1605,1145 1320,1145 1320,875 1605,875 1605,-5 -5,-5
SHLD on Bottom "Polygon_1_Net_SHLD" (solid, remove dead copper, pour order 1): 614,1453 614,1206 211,1206 211,1453
GND on Bottom "Polygon_2_Net_GND" (solid, remove dead copper, pour order 2): -5,1454 1605,1454 1605,1145 1320,1145 1320,875 1605,875 1605,-5 -5,-5

## Keep-outs
Keep-Out Layer:
  the board outline again, w8

## Other copper
Bottom:
  text "v10" at 1581.09,666.59 h34 r90

## Silkscreen, mask and mechanical layers (free items; w line width, h text height)
Dimension:
  the board outline again, w8
tDocu:
  text "Elias Santistevan" at 500,-700 h59.5
tPlace:
  text "+" at 228,238 h42.5
  text "-" at 385,235 h42.5

## Dimensions
100,100 to 100,1349 on tFinish
0,1449 to 1600,1449 on tFinish
0,0 to 0,1449 on tFinish
1600,1449 to 1600,1010 on tFinish
100,1349 to 100,1450 on tFinish
1500,1349 to 1600,1350 on tFinish
414,1207 to 1,1207 on tFinish

## Text inside footprints (layer, text, board x,y; h text height)
E1: Milling "Out" at 1458.12,1010 h30.52 r90; Milling "Route" at 1487.66,1010 h30.52 r90
FRAME1: tDocu "Designed by:" at -250,-700 h59.5; tDocu "https://creativecommons.org/licenses/by-sa/4.0/" at -700,-600 h59.5; tDocu "Released under the Creative Commons Attribution Share-Alike 4.0 License" at -1500,-500 h59.5